# Altium PCB db44breakout(1).PcbDoc
Units mm, origin at the board's own origin, x right, y up, seen from the top; angles counter-clockwise.
Board outline 53.23 x 27.98 mm, 4 copper layers (F.Cu, In1.Cu, In2.Cu, B.Cu); 13 components, 38 nets, 99 pads, 95 vias.
Unrouted connection lines stored in the file: 5.
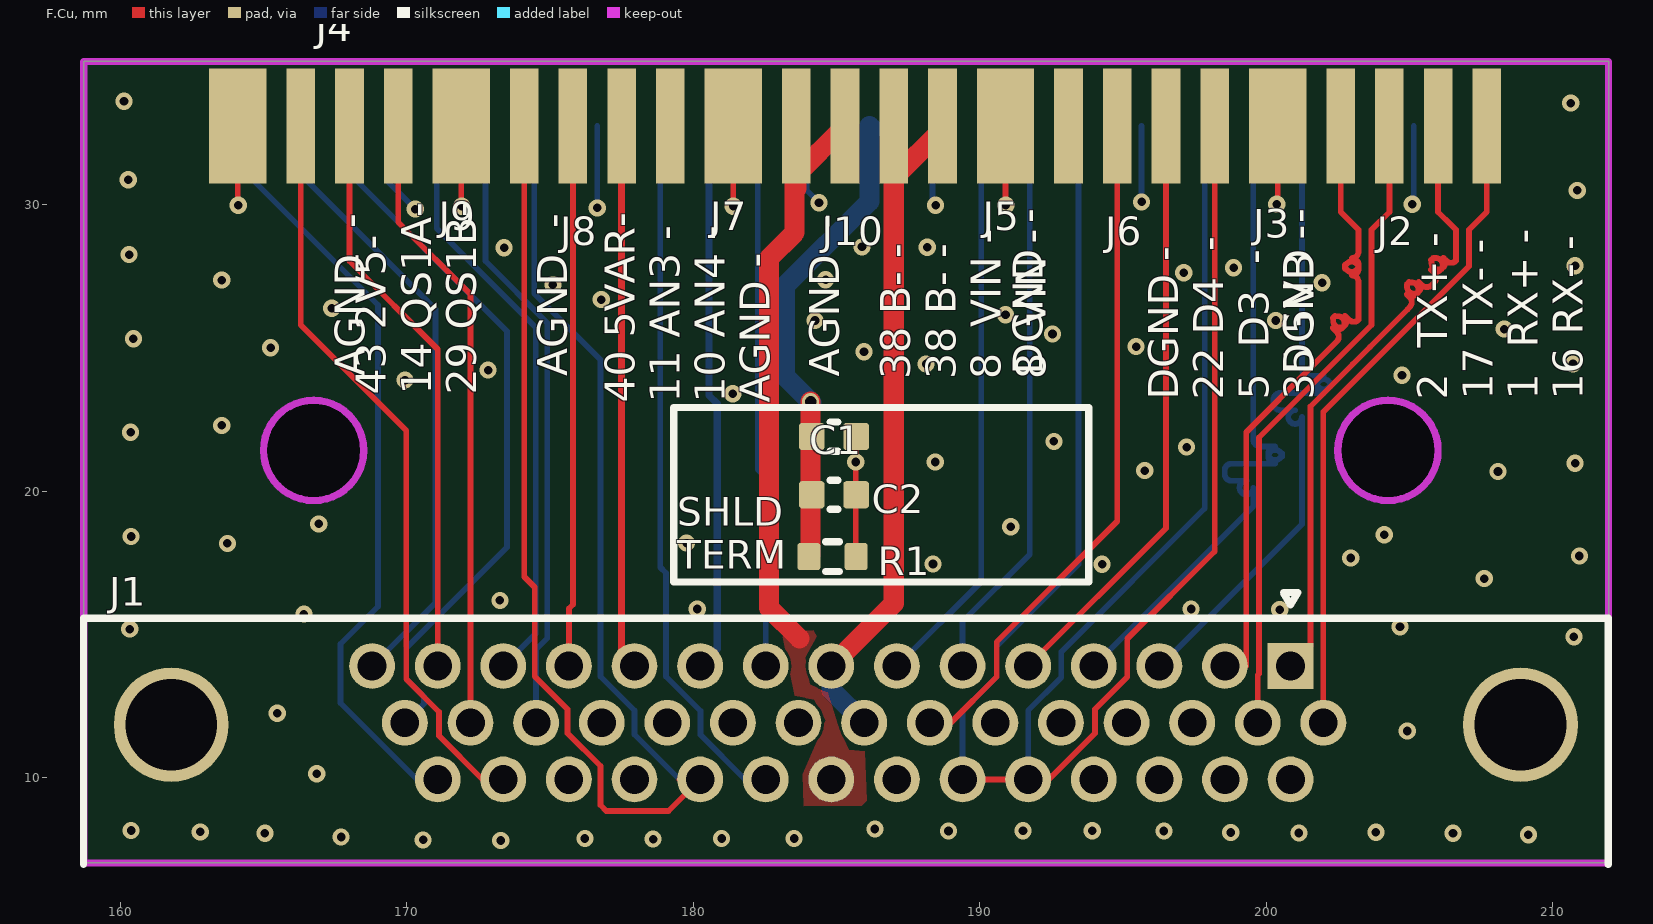
[diagram p0: F.Cu view]
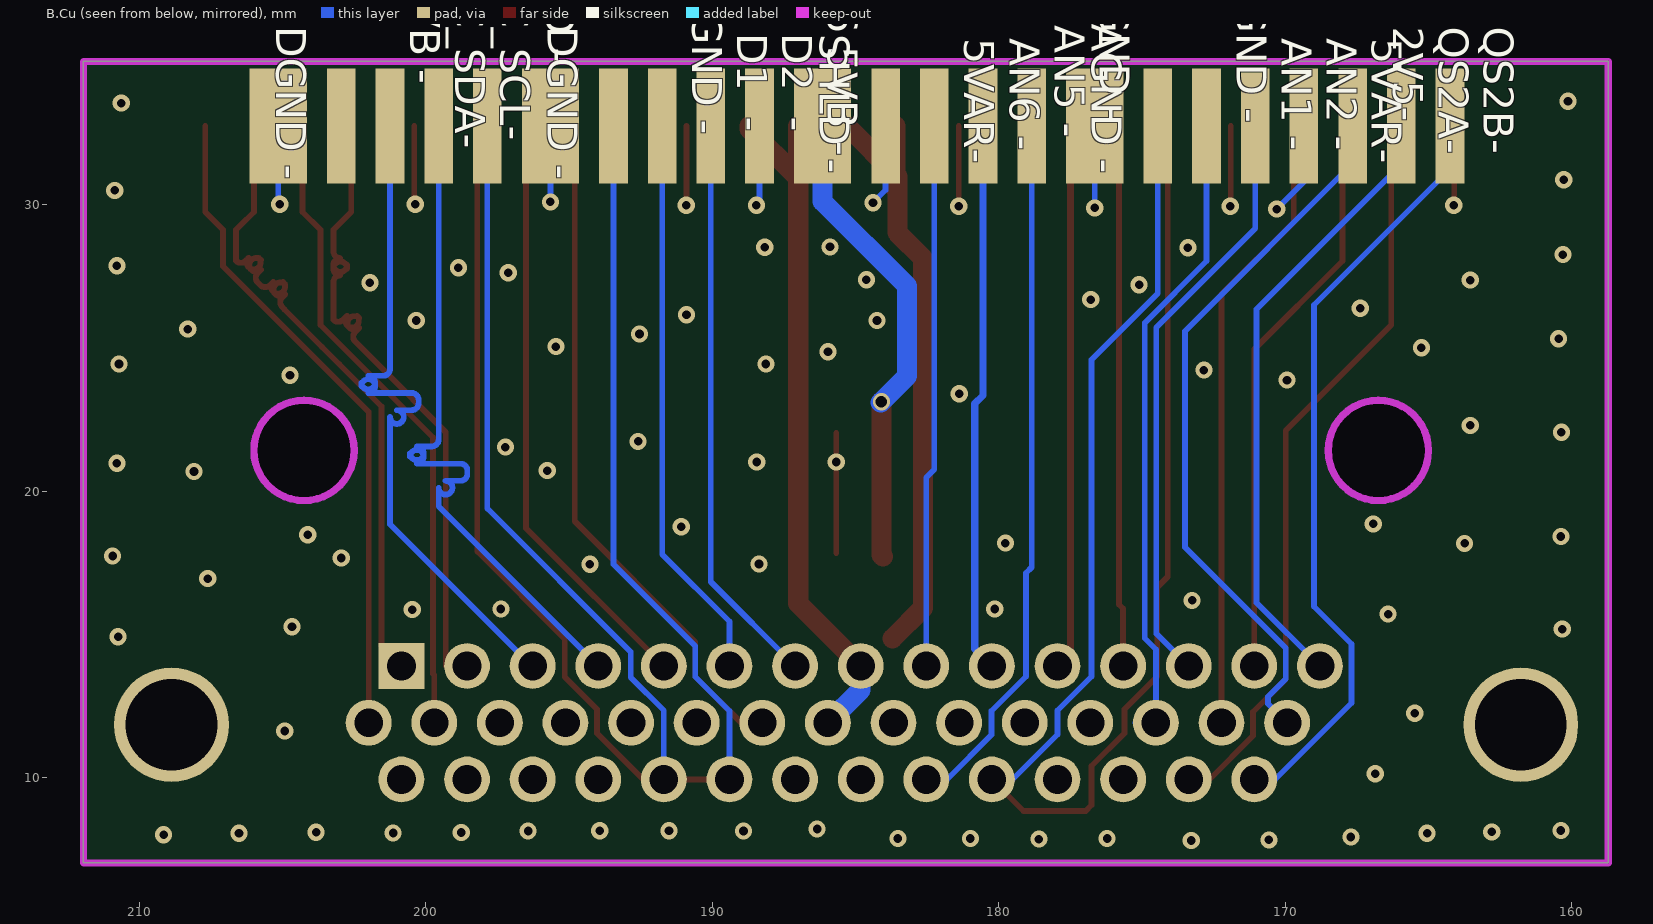
[diagram p1: B.Cu view, seen from below]
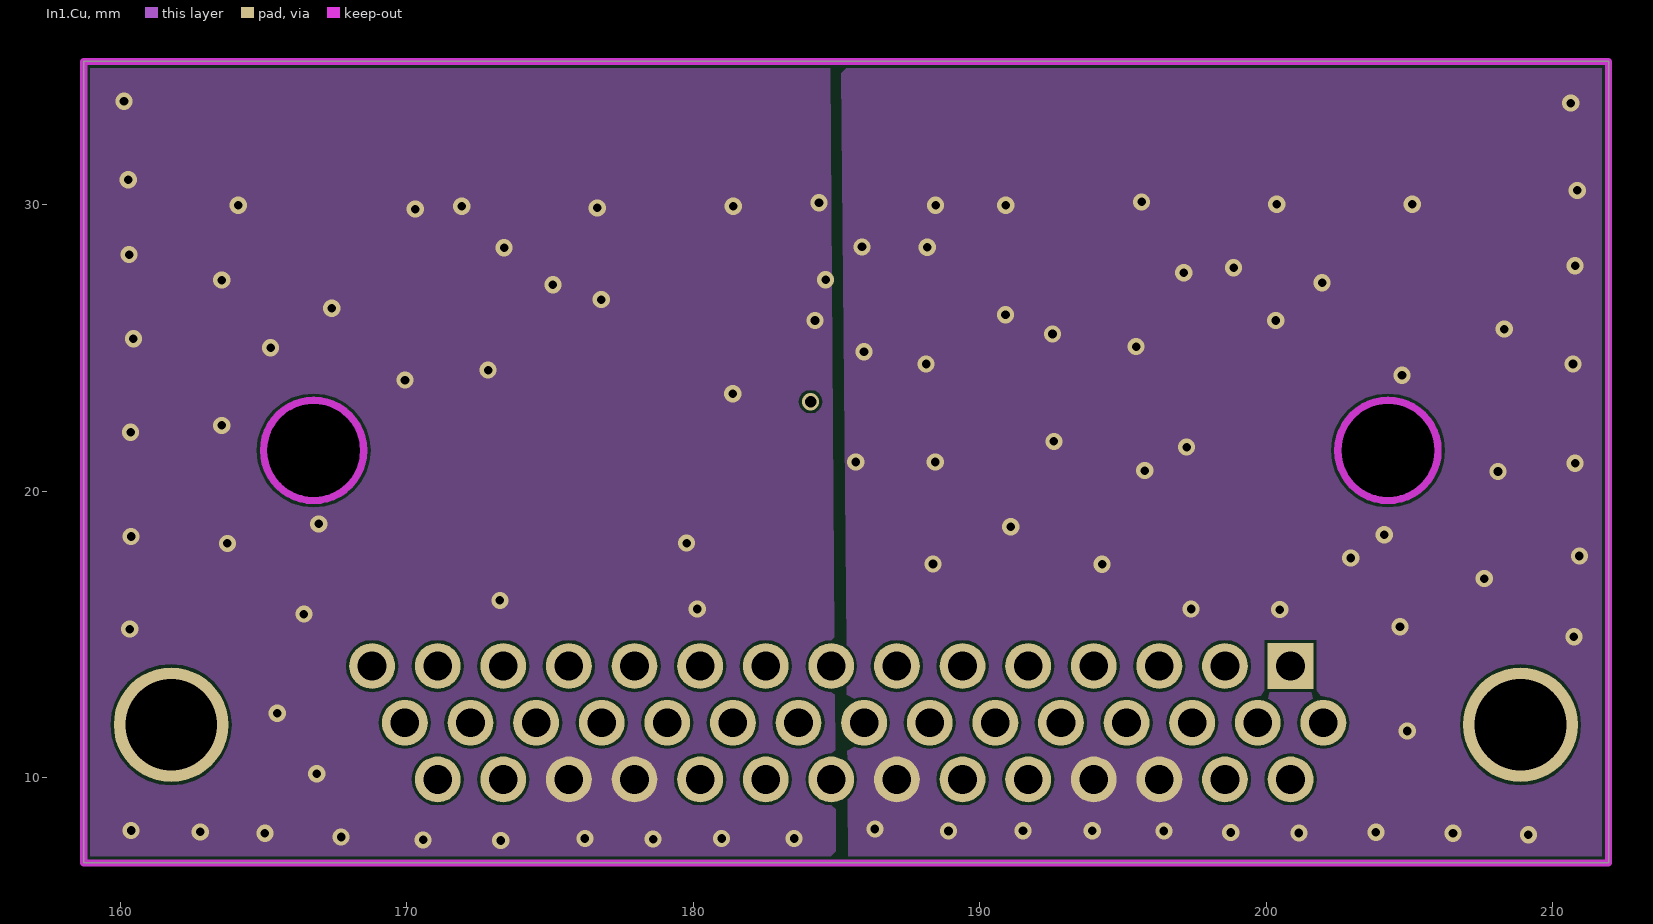
[diagram p2: In1.Cu]
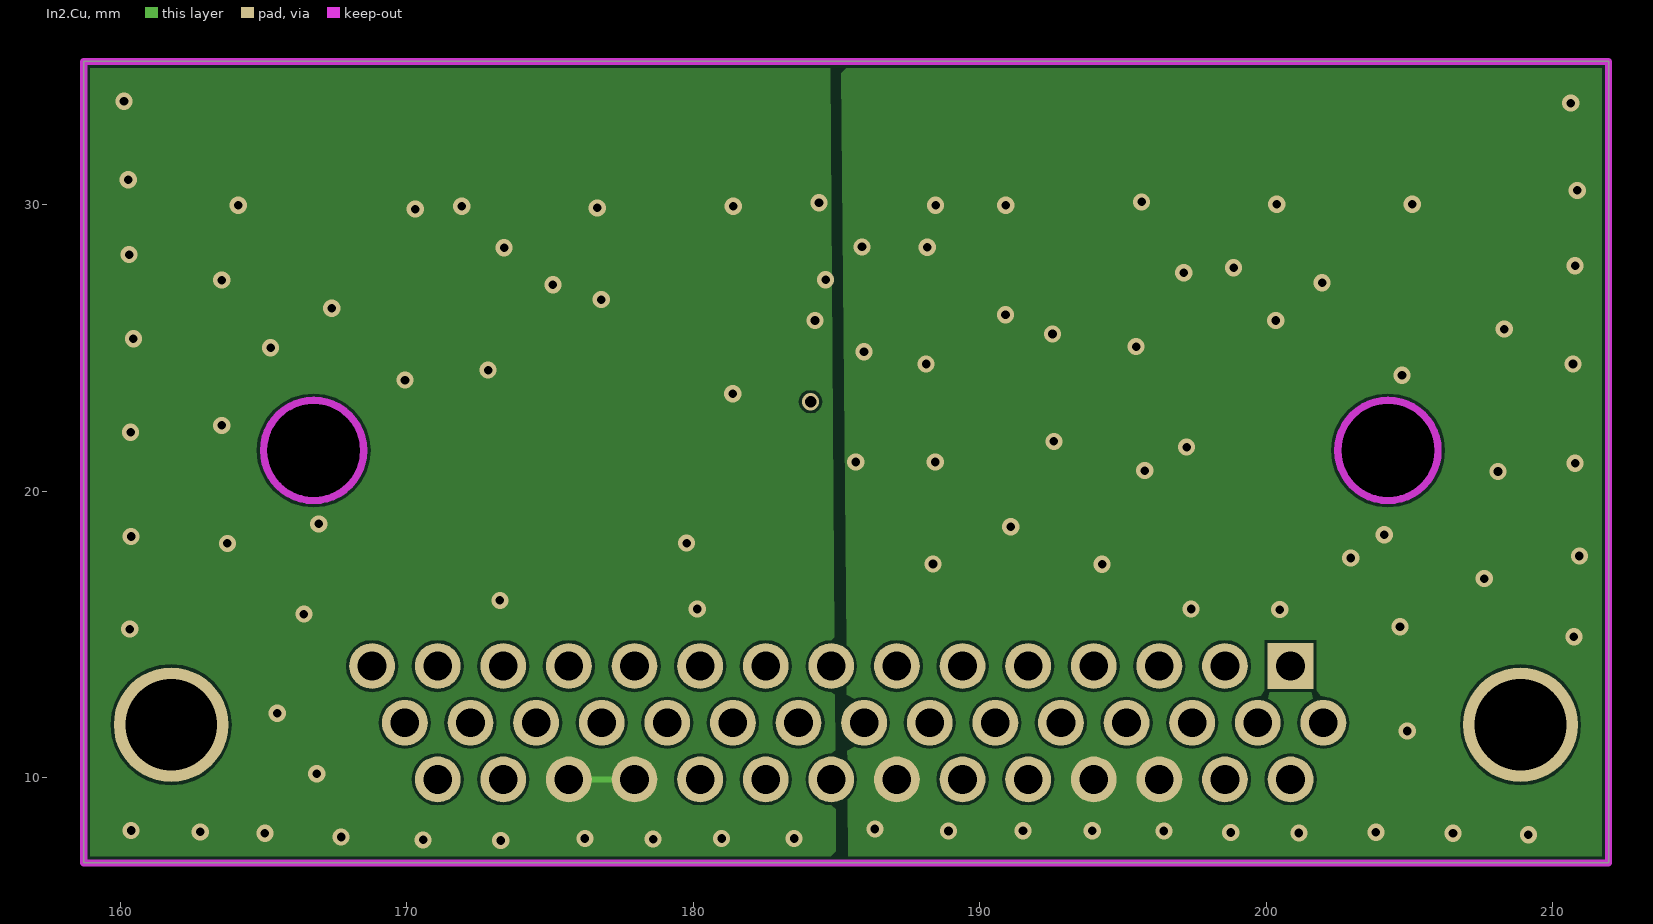
[diagram p3: In2.Cu]

## Layer stack, top to bottom
F.Mask: solder mask 0.0102, Solder Resist, Dk 3.5
F.Cu: signal copper 0.0356
Dielectric 1: dielectric 0.32, FR-4, Dk 4.8
In1.Cu: signal copper 0.0356
Dielectric2: dielectric 0.32, FR-4, Dk 4.8
In2.Cu: signal copper 0.0356
Dielectric3: dielectric 0.32, FR-4, Dk 4.8
B.Cu: signal copper 0.0356
B.Mask: solder mask 0.0102, Solder Resist, Dk 3.5

## Board outline
158.725,35.003 158.725,7.025 211.95,7.025 211.95,35.003 158.725,35.003
cut-out: 206.008,21.425 205.975,21.768 205.875,22.098 205.712,22.402 205.493,22.668 205.227,22.887 204.923,23.05 204.593,23.15 204.25,23.183 203.907,23.15 203.577,23.05 203.273,22.887 203.007,22.668 202.788,22.402 202.625,22.098 202.525,21.768 202.492,21.425 202.525,21.082 202.625,20.752 202.788,20.448 203.007,20.182 203.273,19.963 203.577,19.8 203.907,19.7 204.25,19.667 204.593,19.7 204.923,19.8 205.227,19.963 205.493,20.182 205.712,20.448 205.875,20.752 205.975,21.082 206.008,21.425
cut-out: 168.508,21.425 168.475,21.768 168.375,22.098 168.212,22.402 167.993,22.668 167.727,22.887 167.423,23.05 167.093,23.15 166.75,23.183 166.407,23.15 166.077,23.05 165.773,22.887 165.507,22.668 165.288,22.402 165.125,22.098 165.025,21.768 164.992,21.425 165.025,21.082 165.125,20.752 165.288,20.448 165.507,20.182 165.773,19.963 166.077,19.8 166.407,19.7 166.75,19.667 167.093,19.7 167.423,19.8 167.727,19.963 167.993,20.182 168.212,20.448 168.375,20.752 168.475,21.082 168.508,21.425

## Design rules (kind name [scope] priority, off if disabled: settings)
Clearance "Clearence 0.1_Polygon" [InNamedPolygon('F.Cu-B-') OR InNamedPolygon('In1.Cu-AGND') OR InNamedPolygon('In2.Cu-AGND') OR InNamedPolygon('In1.Cu-DGND') OR InNamedPolygon('In2.Cu-DGND')] p1: gap=0.1 ignorepadtopadclearanceinfootprint=FALSE
MinimumSolderMaskSliver [All] p1: minsoldermaskwidth=0
PolygonConnect Polygon_In2.Cu-DGND_ConnectDirect [IsNamedPolygon('In2.Cu-DGND')] p1: connectstyle=Direct reliefconductorwidth=0.254 reliefentries=4 polygonreliefangle="90 Angle" airgapwidth=0.254
PolygonConnect Polygon_In1.Cu-DGND_ConnectDirect [IsNamedPolygon('In1.Cu-DGND')] p2: connectstyle=Direct reliefconductorwidth=0.254 reliefentries=4 polygonreliefangle="90 Angle" airgapwidth=0.254
PolygonConnect Polygon_In2.Cu-AGND_ConnectDirect [IsNamedPolygon('In2.Cu-AGND')] p3: connectstyle=Direct reliefconductorwidth=0.254 reliefentries=4 polygonreliefangle="90 Angle" airgapwidth=0.254
PolygonConnect Polygon_In1.Cu-AGND_ConnectDirect [IsNamedPolygon('In1.Cu-AGND')] p4: connectstyle=Direct reliefconductorwidth=0.254 reliefentries=4 polygonreliefangle="90 Angle" airgapwidth=0.254
PolygonConnect Polygon_F.Cu-B-_ConnectDirect [IsNamedPolygon('F.Cu-B-')] p5: connectstyle=Direct reliefconductorwidth=0.254 reliefentries=4 polygonreliefangle="90 Angle" airgapwidth=0.254
RoutingVias [All] p1: holewidth=0.711 width=1.27 viastyle="Through Hole" minholewidth=0.711 minwidth=1.27 maxholewidth=0.711 maxwidth=1.27
SilkToSilkClearance [All] p1: silktosilkclearance=0
SilkToSolderMaskClearance [IsPad] p1: minsilkscreentomaskgap=0 clearancetoexposedcopper=TRUE
SolderMaskExpansion [All] p1: expansion=0.102 istentingtop=FALSE
Width [All] p1: maxlimit=10 minlimit=0.254 preferedwidth=0.254 midlayer1_maxwidth=0.254 minimp=50.000000 maximp=50.000000 favimp=50.000000
27 further rules are at their usual default settings.

## Components (designator, comment, footprint, x,y, rotation, side; value= is the part's Value field where it differs from the comment)
C1 "Comment" C_0603_1608Metric 184.912,21.909 r180 top value=0.1uF
C2 "Comment" C_0603_1608Metric 184.912,19.877 r0 top value=1nF
J1 "Comment" DSUB-44-HD_Female_Horizontal_P2.29x1.98mm_EdgePinOffset3.03mm_Housed_MountingHolesOffset4.94mm 200.85,13.9 r0 top value=Conn_01x44_Socket
J2 "Comment" 1x5WirePadsFront 205.15,32.75 r180 top value=Conn_01x05
J3 "Comment" 1x5WirePadsBack 200.4,32.75 r180 top value=Conn_01x05
J4 "Comment" 1x7WirePads 167.15,32.749 r0 top value=Conn_01x07
J5 "Comment" 1x5WirePadsBack 190.9,32.75 r180 top value=Conn_01x05
J6 "Comment" 1x5WirePadsFront 195.65,32.75 r180 top value=Conn_01x05
J7 "Comment" 1x5WirePadsBack 181.4,32.75 r180 top value=Conn_01x05
J8 "Comment" 1x5WirePadsFront 176.65,32.75 r180 top value=Conn_01x05
J9 "Comment" 1x5WirePadsBack 171.9,32.75 r180 top value=Conn_01x05
J10 "Comment" 1x5WirePadsFront 186.15,32.75 r180 top value=Conn_01x05
R1 "Comment" R_0603_1608Metric 184.862,17.718 r180 top value=1M

## Footprints (in the part's own frame and the unit in brackets; to place one, negate y for a bottom-side part, rotate by r counter-clockwise, add the part's x,y. Pads: shape width x height; smd on the part's side, far side on the other; paste and mask are expansions set on the pad)
1x5WirePadsBack [mm]
  rect 1x4 smd far side mask+0: 1(-2.55,0) 2(-0.85,0) 3(0.85,0) 4(2.55,0)
  rect 2x4 smd mask+0: 5(0,0)
1x5WirePadsFront [mm]
  rect 1x4 smd mask+0: 1(-2.55,0) 2(-0.85,0) 3(0.85,0) 4(2.55,0)
  rect 2x4 smd far side mask+0: 5(0,0)
1x7WirePads [mm]
  rect 1x4 smd mask+0: 1(2.55,0) 2(0.85,0) 3(-0.85,0)
  rect 1x4 smd far side mask+0: 4(0.5,0) 5(-1.2,0) 6(-2.9,0)
  rect 2x4 smd mask+0: 7(-3.05,0)
C_0603_1608Metric [mm]
  rrect25% 0.9x0.95 smd mask+0: 1(-0.775,0) 2(0.775,0)
  silkscreen extent -0.14,-0.51 0.14,0.51
DSUB-44-HD_Female_Horizontal_P2.29x1.98mm_EdgePinOffset3.03mm_Housed_MountingHolesOffset4.94mm [mm]
  round 4 hole 3.2 paste-2539.97 mask+0: 0(-39.075,-2.05) 0(8.025,-2.05)
  rect 1.6x1.6 hole 1 paste-2539.97 mask+0: 1(0,0)
  round 1.6 hole 1 paste-2539.97 mask+0: 2(-2.29,0) 3(-4.58,0) 4(-6.87,0) 5(-9.16,0) 6(-11.45,0) 7(-13.74,0) 8(-16.03,0) 9(-18.32,0) 10(-20.61,0) 11(-22.9,0) 12(-25.19,0) 13(-27.48,0) 14(-29.77,0) 15(-32.06,0) 16(1.145,-1.98) 17(-1.145,-1.98) 18(-3.435,-1.98) 19(-5.725,-1.98) 20(-8.015,-1.98) 21(-10.305,-1.98) 22(-12.595,-1.98) 23(-14.885,-1.98) 24(-17.175,-1.98) 25(-19.465,-1.98) 26(-21.755,-1.98) 27(-24.045,-1.98) 28(-26.335,-1.98) 29(-28.625,-1.98) 30(-30.915,-1.98) 31(0,-3.96) 32(-2.29,-3.96) 33(-4.58,-3.96) 34(-6.87,-3.96) 35(-9.16,-3.96) 36(-11.45,-3.96) 37(-13.74,-3.96) 38(-16.03,-3.96) 39(-18.32,-3.96) 40(-20.61,-3.96) 41(-22.9,-3.96) 42(-25.19,-3.96) 43(-27.48,-3.96) 44(-29.77,-3.96)
  silkscreen extent -42.14,-6.93 11.08,2.56
R_0603_1608Metric [mm]
  rrect25% 0.8x0.95 smd mask+0: 1(-0.825,0) 2(0.825,0)
  silkscreen extent -0.24,-0.52 0.24,0.52

## Part data
C1 C2: library part C_0603_1608Metric, "Capacitor SMD 0603 (1608 Metric), square (rectangular) end terminal, IPC_7351 nominal, (Body size source: IPC-SM-782 page 76, https://www.pcb-3d.com/wordpress/wp-content/uploads/ipc-sm-782a_amendment_1_and_2.pdf), generated with kicad-footprint-generator", Footprint=Capacitor_SMD:C_0603_1608Metric, Description="Unpolarized capacitor", ki_fp_filters=C_*
J1: library part DSUB-44-HD_Female_Horizontal_P2.29x1.98mm_EdgePinOffset3.03mm_Housed_MountingHolesOffset4.94mm, "44-pin D-Sub connector, horizontal/angled (90 deg), THT-mount, female, pitch 2.29x1.98mm, pin-PCB-offset 3.0300000000000002mm, distance of mounting holes 47.1mm, distance of mounting holes to PCB edge 4.9399999999999995mm, see https://disti-assets.s3.amazonaws.com/tonar/files/datasheets/16730.pdf", Footprint=Connector_Dsub:DSUB-44-HD_Female_Horizontal_P2.29x1.98mm_EdgePinOffset3.03mm_Housed_MountingHolesOffset4.94mm, Description="\"Generic connector, single row, 01x44, script generated\"", ki_fp_filters=Connector*:*_1x??_*
J2 J6 J8 J10: library part 1x5WirePadsFront, Footprint=Connector_Wire:1x5WirePadsFront, Description="Generic connector, single row, 01x05, script generated (kicad-library-utils/schlib/autogen/connector/)", ki_fp_filters=Connector*:*_1x??_*
J3 J5 J7 J9: library part 1x5WirePadsBack, Footprint=Connector_Wire:1x5WirePadsBack, Description="Generic connector, single row, 01x05, script generated (kicad-library-utils/schlib/autogen/connector/)", ki_fp_filters=Connector*:*_1x??_*
J4: library part 1x7WirePads, Footprint=Connector_Wire:1x7WirePads, Description="Generic connector, single row, 01x07, script generated (kicad-library-utils/schlib/autogen/connector/)", ki_fp_filters=Connector*:*_1x??_*
R1: library part R_0603_1608Metric, "Resistor SMD 0603 (1608 Metric), square (rectangular) end terminal, IPC_7351 nominal, (Body size source: IPC-SM-782 page 72, https://www.pcb-3d.com/wordpress/wp-content/uploads/ipc-sm-782a_amendment_1_and_2.pdf), generated with kicad-footprint-generator", Footprint=Resistor_SMD:R_0603_1608Metric, Description=Resistor, ki_fp_filters=R_*

## Via types
v1: diameter 0.6, hole 0.3, F.Cu to B.Cu, tented both sides, 94 vias
v2: diameter 0.6, hole 0.4, F.Cu to B.Cu, tented both sides, 1 vias

## Nets (pads, with @x,y where several pads share a name; then routed paths per layer and width w, separated by ;. In a path a pad name is that pad's centre, name@x,y a point inside that pad or via, vN(x,y) a via of type N, cw(c..) or ccw(c..) an arc to the next point about the centre after c; other vN are vias at no path point)
2V5AR: J1.43 J1.44 J4.3 J4.6 | length 53.3
  F.Cu w0.2: J4.3 166.3,25.8 169.98,22.12 169.98,13.444 171.125,12.299 171.125,11.464 172.649,9.94 J1.43
  B.Cu w0.2: J4.6 164.25,31.249 169,26.499 169,15.975 167.69,14.665 167.69,12.609 170.359,9.94 J1.44
5VAR: J1.39 J1.40 J7.4 J8.4 J9.1 | length 79.9
  F.Cu w0.2: J8.4 174.1,17.016 174.47,16.646 174.47,13.534 175.615,12.389 175.615,11.554 176.76,10.409 176.76,9.044 176.964,8.84 179.14,8.84 J1.40 J1.40@179.519,9.94
  B.Cu w0.2: J9.1 174.45,26.9 176.76,24.59 176.76,13.534 177.95,12.344 177.95,11.509 179.519,9.94 J1.40 ; J7.4 178.85,17.35 179.05,17.15 179.05,13.534 180.25,12.334 180.25,11.499 181.809,9.94 J1.39
5VBuck: J1.35 J1.36 J3.4 J5.1 J6.1 | length 78.1
  F.Cu w0.2: J1.36 J1.35 192.411,9.94 194.025,11.554 194.025,12.389 195.15,13.514 195.15,14.85 198.2,17.9 J6.1
  B.Cu w0.2: J1.36 189.4,12.331 190.59,13.521 190.59,14.59 193.45,17.45 J5.1 ; J1.35 191.69,12.344 192.85,13.504 192.85,14.4 197.85,19.4 J3.4
AGND: J1.41 J1.42 J4.7 J7.1 J7.5 J8.1 J8.5 J9.4 J9.5 | length 21.4
  F.Cu w0.2: J4.7 164.1,30 v1(164.12,29.98) ; J9.5 171.9,29.97 v1(171.92,29.95) ; v1(181.4,29.95) J7.5
  In2.Cu w0.2: J1.42 J1.41
  B.Cu w0.2: J9.4@169.35,30.994 J9.4 169.35,30.8 v1(170.3,29.85) ; v1(176.65,29.89) J8.5 ; J7.1 183.95,30.51 v1(184.39,30.07)
  other v1: 173.28,7.81 170.57,7.83 178.6,7.86 176.22,7.88 180.99,7.88 183.52,7.88 167.71,7.93 165.05,8.06 162.79,8.11 160.38,8.16 166.86,10.14 165.48,12.25 160.33,15.19 166.41,15.71 180.14,15.89 173.25,16.19 163.74,18.18 179.77,18.19 160.38,18.42 166.93,18.86 160.36,22.06 163.54,22.3 181.38,23.4 169.94,23.88 172.84,24.23 165.25,25.01 160.46,25.32 184.25,25.96 167.38,26.39 176.79,26.69 175.1,27.21 163.54,27.37 184.62,27.38 160.31,28.26 173.4,28.5 160.28,30.87 160.13,33.61
AN1: J1.13 J9.3 | length 20.7
  B.Cu w0.2: J9.3 171.05,29.169 174.5,25.719 174.5,15.03 J1.13
AN2: J1.12 J8.3 | length 18.9
  F.Cu w0.2: J1.12 175.66,15.91 175.8,16.05 J8.3
AN3: J1.11 J8.2 | length 19
  F.Cu w0.25: J8.2 177.5,14.35 J1.11
AN4: J1.10 J7.3 | length 19.2
  B.Cu w0.25: J1.10 180.838,14.498 180.838,23.058 180.55,23.346 J7.3
AN5: J1.9 J7.2 | length 19
  B.Cu w0.2: J7.2 182.25,20.76 182.53,20.48 J1.9
AN6: J1.28 J9.2 | length 22.6
  B.Cu w0.2: J9.2 172.75,28.034 174.9,25.884 174.9,14.864 174.515,14.479 J1.28 J1.28@175.236,11.92
B-: J1.38 J10.3 J10.4 | length 21.7
  F.Cu w0.7: J10.4 183.6,30.57 183.54,30.51 ; 183.71,14.86 182.64,15.93 182.64,28.127 183.54,29.027 183.54,30.51 ; J10.3 183.54,30.99 183.54,30.51
D1: J1.7 J5.3 | length 20.1
  B.Cu w0.2: J1.7 190.05,16.84 J5.3
D2: J1.6 J5.2 | length 19.8
  B.Cu w0.2: J1.6 189.4,15.45 191.75,17.8 J5.2
D3: J1.5 J6.2 | length 20.8
  F.Cu w0.2: J1.5 196.5,18.71 J6.2
D4: J1.22 J6.3 | length 24
  F.Cu w0.2: J1.22 188.989,11.92 190.59,13.521 190.59,14.74 194.8,18.95 J6.3
DGND: C1.1 C2.2 J1.33 J1.34 J1.37 J2.5 J3.1 J3.5 J5.4 J5.5 J6.4 J6.5 R1.1 | length 18.6
  F.Cu w0.2: R1.1@185.674,17.845 185.674,20.004 v1(185.674,21.02) C1.1@185.674,22.036 ; J5.5 190.9,29.99 v1(190.91,29.98) ; J1.34 J1.34@194.31,9.94 ; J1.33@195.89,9.94 J1.33 ; v1(200.37,30.02) 200.4,30.05 J3.5
  B.Cu w0.2: J5.4 188.35,30.09 v1(188.46,29.98) ; v1(195.65,30.1) 195.65,30.183 J6.5 ; v1(205.1,30.02) 205.15,30.07 J2.5
  other v1: 209.15,8.01 206.52,8.06 201.14,8.07 198.76,8.09 203.83,8.1 188.91,8.14 196.43,8.14 191.51,8.15 193.93,8.15 186.34,8.21 204.92,11.63 210.74,14.92 204.67,15.27 200.47,15.87 197.38,15.89 207.61,16.95 188.37,17.46 194.27,17.45 202.95,17.67 210.93,17.74 204.12,18.48 191.08,18.76 208.09,20.69 195.76,20.72 210.78,20.98 188.45,21.02 197.22,21.54 192.59,21.74 204.74,24.05 188.13,24.44 210.71,24.44 185.96,24.87 195.46,25.05 192.54,25.49 208.31,25.66 200.33,25.96 190.9,26.16 201.95,27.28 197.12,27.63 198.86,27.8 210.78,27.87 185.89,28.53 188.17,28.52 210.86,30.5 210.63,33.55
I2C_SCL: J1.3 J3.2 | length 26.6
  B.Cu w0.2: J1.3 196.3,13.9 201.25,18.85 201.25,22.591 cw(c201.01,22.591) 201.01,22.831 200.49,22.831 cw(c200.49,23.071) 200.25,23.071 200.25,23.191 cw(c200.49,23.191) 200.49,23.431 201.01,23.431 202.01,23.431 cw(c202.01,23.671) 202.25,23.671 202.25,23.791 cw(c202.01,23.791) 202.01,24.031 201.49,24.031 cw(c201.49,24.271) 201.25,24.271 201.25,24.391 201.25,24.709 J3.2
I2C_SDA: J1.4 J3.3 | length 26.8
  B.Cu w0.2: J1.4 199.55,19.47 199.55,20.124 cw(c199.31,20.124) 199.31,20.364 198.79,20.364 cw(c198.79,20.604) 198.55,20.604 198.55,20.724 cw(c198.79,20.724) 198.79,20.964 199.31,20.964 200.31,20.964 cw(c200.31,21.204) 200.55,21.204 200.55,21.324 cw(c200.31,21.324) 200.31,21.564 199.79,21.564 cw(c199.79,21.804) 199.55,21.804 199.55,21.924 199.55,22.162 J3.3
QS1A-: J1.14 J4.2 | length 20.1
  F.Cu w0.2: J4.2 168,28.034 171.08,24.954 J1.14
QS1B-: J1.29 J4.1 | length 21.9
  F.Cu w0.2: J4.1 169.7,29.4 172.225,26.875 J1.29
QS2A-: J1.15 J4.5 | length 21.9
  B.Cu w0.2: J4.5 165.95,31.4 171,26.35 171,16.11 J1.15
QS2B-: J1.30 J4.4 | length 25.2
  B.Cu w0.2: J4.4 167.65,31.437 173.5,25.587 173.5,18.044 169.98,14.524 169.98,13.444 170.6,12.824 170.6,12.585 J1.30
RX+: J1.1 J2.2 | length 26.2
  F.Cu w0.2: J1.1 201.545,14.595 201.545,22.963 203.007,24.425 203.62,25.038 204.928,26.346 205.013,26.431 ccw(c204.843,26.601) 205.013,26.77 204.902,26.881 ccw(c205.072,27.05) 204.902,27.22 204.987,27.305 ccw(c205.157,27.135) 205.327,27.305 205.437,27.195 ccw(c205.607,27.364) 205.776,27.195 205.861,27.28 ccw(c205.692,27.449) 205.861,27.619 205.751,27.729 ccw(c205.921,27.899) 205.751,28.069 205.836,28.154 ccw(c206.006,27.984) 206.175,28.154 206.286,28.043 ccw(c206.455,28.213) 206.625,28.043 206.625,28.475 206.625,29.125 206.456,29.294 206,29.75 J2.2
RX-: J1.16 J2.1 | length 23.2
  F.Cu w0.2: J1.16 201.995,22.777 207.075,27.857 207.075,29.125 207.7,29.75 J2.1
SHGND: C1.2 C2.1 J10.5 R1.2 | length 17
  F.Cu w0.2: R1.2@184.024,17.845 R1.2@184.124,17.945
  F.Cu w0.7: R1.2 184.095,17.776 v2(184.095,23.125)
  B.Cu w0.7: v2@184.12,23.1 v2(184.095,23.125) 183.2,24.02 183.2,27.162 186.15,30.112 J10.5 J10.5@186.25,32.65
TX+: J1.2 J2.4 | length 26
  F.Cu w0.2: J1.2 199.3,13.9 199.3,22.062 201.605,24.367 201.917,24.679 202.376,25.138 202.461,25.223 ccw(c202.292,25.393) 202.461,25.562 202.32,25.704 ccw(c202.49,25.873) 202.32,26.043 202.405,26.128 ccw(c202.575,25.958) 202.744,26.128 202.886,25.987 ccw(c203.055,26.156) 203.225,25.987 203.225,26.526 203.225,27.176 203.225,27.296 ccw(c202.985,27.296) 202.985,27.536 ccw(c202.985,27.776) 202.745,27.776 202.745,27.896 ccw(c202.985,27.896) 202.985,28.136 ccw(c202.985,28.376) 203.225,28.376 203.225,29.125 202.6,29.75 J2.4
TX-: J1.17 J2.3 | length 22.7
  F.Cu w0.2: J1.17 199.705,13.582 199.75,13.627 199.75,21.875 203.675,25.8 203.675,29.125 204.3,29.75 J2.3
unconnected-(J1-Pin_18-Pad18): J1.18
unconnected-(J1-Pin_19-Pad19): J1.19
unconnected-(J1-Pin_20-Pad20): J1.20
unconnected-(J1-Pin_21-Pad21): J1.21
unconnected-(J1-Pin_24-Pad24): J1.24
unconnected-(J1-Pin_25-Pad25): J1.25
unconnected-(J1-Pin_26-Pad26): J1.26
unconnected-(J1-Pin_27-Pad27): J1.27
unconnected-(J1-Pin_31-Pad31): J1.31
unconnected-(J1-Pin_32-Pad32): J1.32
VIN: J1.8 J1.23 J10.1 J10.2 | length 30.5
  F.Cu w0.7: J1.8 187,16.08 187,26.1 ; J10.2@187,31.05 187,30.11 ; J10.2 187,26.1 ; J10.1 188.7,32.64 187,30.94 187,30.11 ; 187,26.1 187,30.11
  B.Cu w0.7: J1.8 184.82,13.065 J1.23
pads on no net: J1.0

## Polygon pours and split planes (outlines as drawn)
B- on F.Cu "F.Cu-B-" (solid, remove dead copper, pour order 7): 183.08,15.11 183.55,12.87 184.22,12.72 184.63,12 183.82,10.12 183.85,9.01 186.07,9.02 185.99,10.93 185.43,10.97 185.04,11.85 184.69,12.98 184.07,13.26 183.91,14.21 184.44,15.16
DGND on In1.Cu "In1.Cu-DGND" (solid, remove dead copper, pour order 6): 185.142,38.018 214.232,38.268 214.533,4.053 185.443,4.35
AGND on In1.Cu "In1.Cu-AGND" (solid, remove dead copper, pour order 8): 184.75,38.1 157,37.85 157,4.35 185,4.35
DGND on In2.Cu "In2.Cu-DGND" (solid, remove dead copper, pour order 5): 185.142,38.018 214.232,38.268 214.533,4.053 185.443,4.35
AGND on In2.Cu "In2.Cu-AGND" (solid, remove dead copper, pour order 9): 184.75,38.1 157,37.85 157,4.35 185,4.35

## Keep-outs
Edge.Cuts:
  circle w0.254: c204.25,21.425 r1.75
  circle w0.254: c166.75,21.425 r1.75
  lines w0: 158.725,7.025 211.95,7.025 211.95,35.003 158.725,35.003 158.725,7.025
  lines w0.254: 158.725,7.025 211.95,7.025 211.95,35.003 158.725,35.003 158.725,7.025

## Silkscreen, mask and mechanical layers (free items; w line width, h text height)
F.SilkS:
  lines w0.254: 179.324,16.829 193.802,16.829 193.802,22.925 179.324,22.925 179.324,16.829
  text "DGND  -" at 192.192,24.073 h1.05 r90
  text "DGND  -" at 201.64,24.073 h1.05 r90
  text "AGND  -" at 168.526,24.022 h1.05 r90
  text "AGND  -" at 175.601,24.022 h1.05 r90
  text "AGND  -" at 185.101,23.997 h1.05 r90
  text "38 B- - / 38 B- - / 8  VIN - / 8  VIN -" at 192.308,23.908 h1.05 r90
  text "43 2V5- / 14 QS1A- / 29 QS1B-" at 172.425,23.372 h1.05 r90
  text "DGND - / 22 D4  - / 5  D3  - / 35 5VB -" at 201.655,23.198 h1.05 r90
  text "2  TX+ - / 17 TX- - / 1  RX+ - / 16 RX- -" at 211.053,23.194 h1.05 r90
  text "40 5VAR- / 11 AN3 - / 10 AN4 - / AGND -" at 182.676,23.087 h1.05 r90
  text "SHLD / TERM" at 179.451,17.287 h1
B.SilkS:
  text "DGND - / 3  I2C_SCL- / 4  I2C_SDA- / 35 5VB -" at 200.549,40.333 h1.05 r90
  text "30 QS2B- / 15 QS2A- / 44 2V5-" at 166.225,38.493 h1.05 r90
  text "40 5VAR- / 12 AN2 - / 13 AN1 - / AGND -" at 171.699,38.093 h1.05 r90
  text "AGND - / 9  AN5 - / 28 AN6 - / 39 5VAR-" at 181.199,38.093 h1.05 r90
  text "36 5VB - / 6  D2  - / 7  D1  - / DGND -" at 190.699,37.818 h1.05 r90
  text "AGND -" at 176.75,36.334 h1.05 r90
  text "DGND -" at 195.75,36.224 h1.05 r90
  text "DGND -" at 205.225,36.224 h1.05 r90
  text "SHLD -" at 186.25,35.949 h1.05 r90